# Allegro board KB_V16.brd
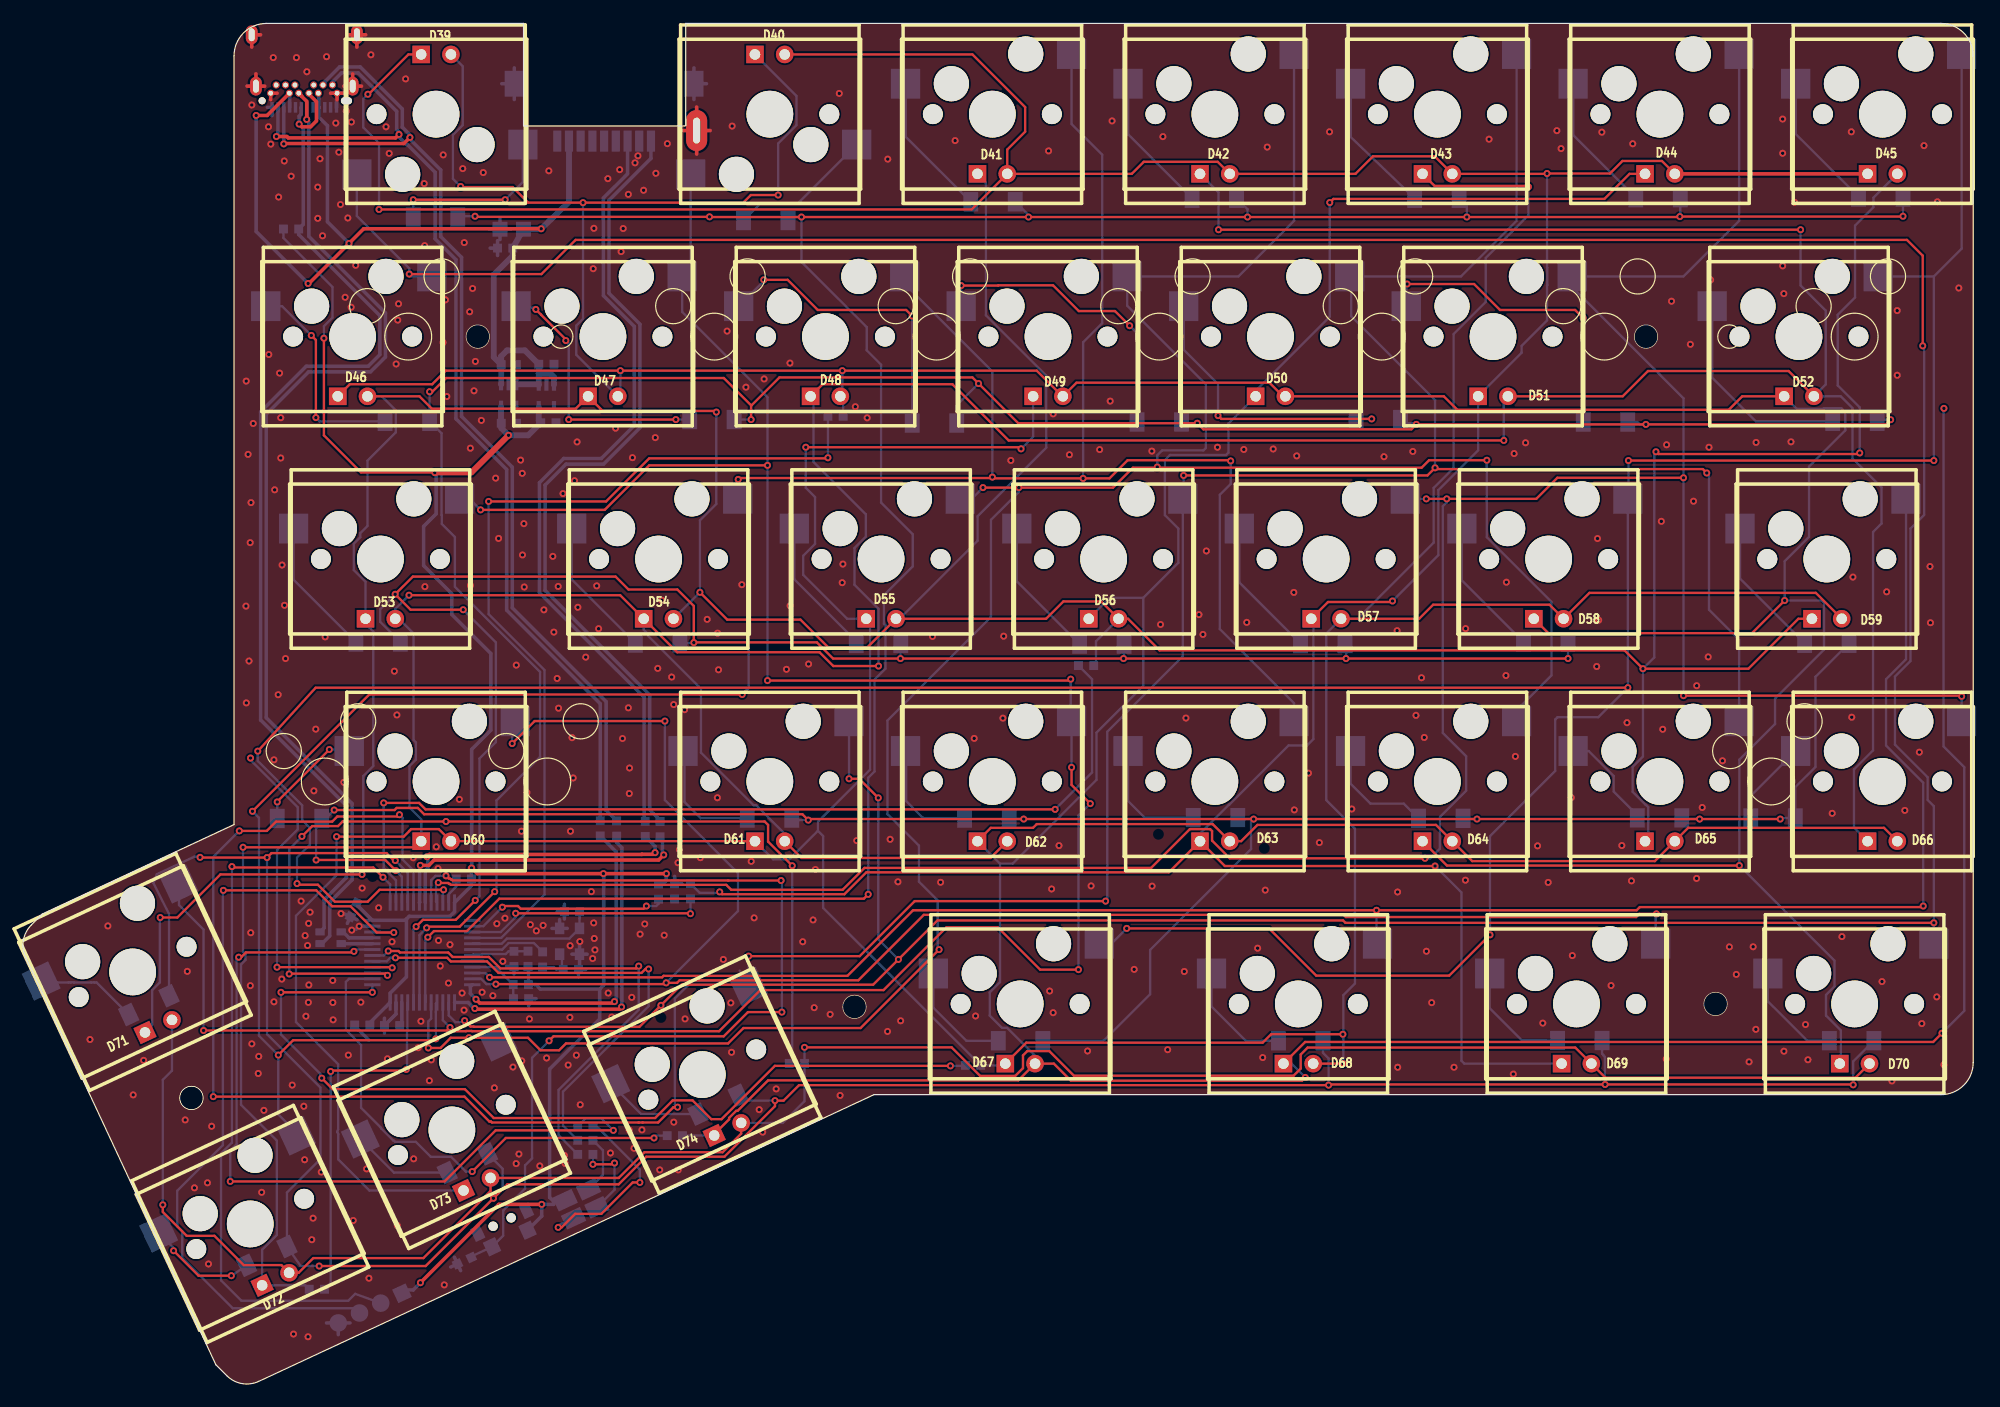
[diagram p0: board, top side]
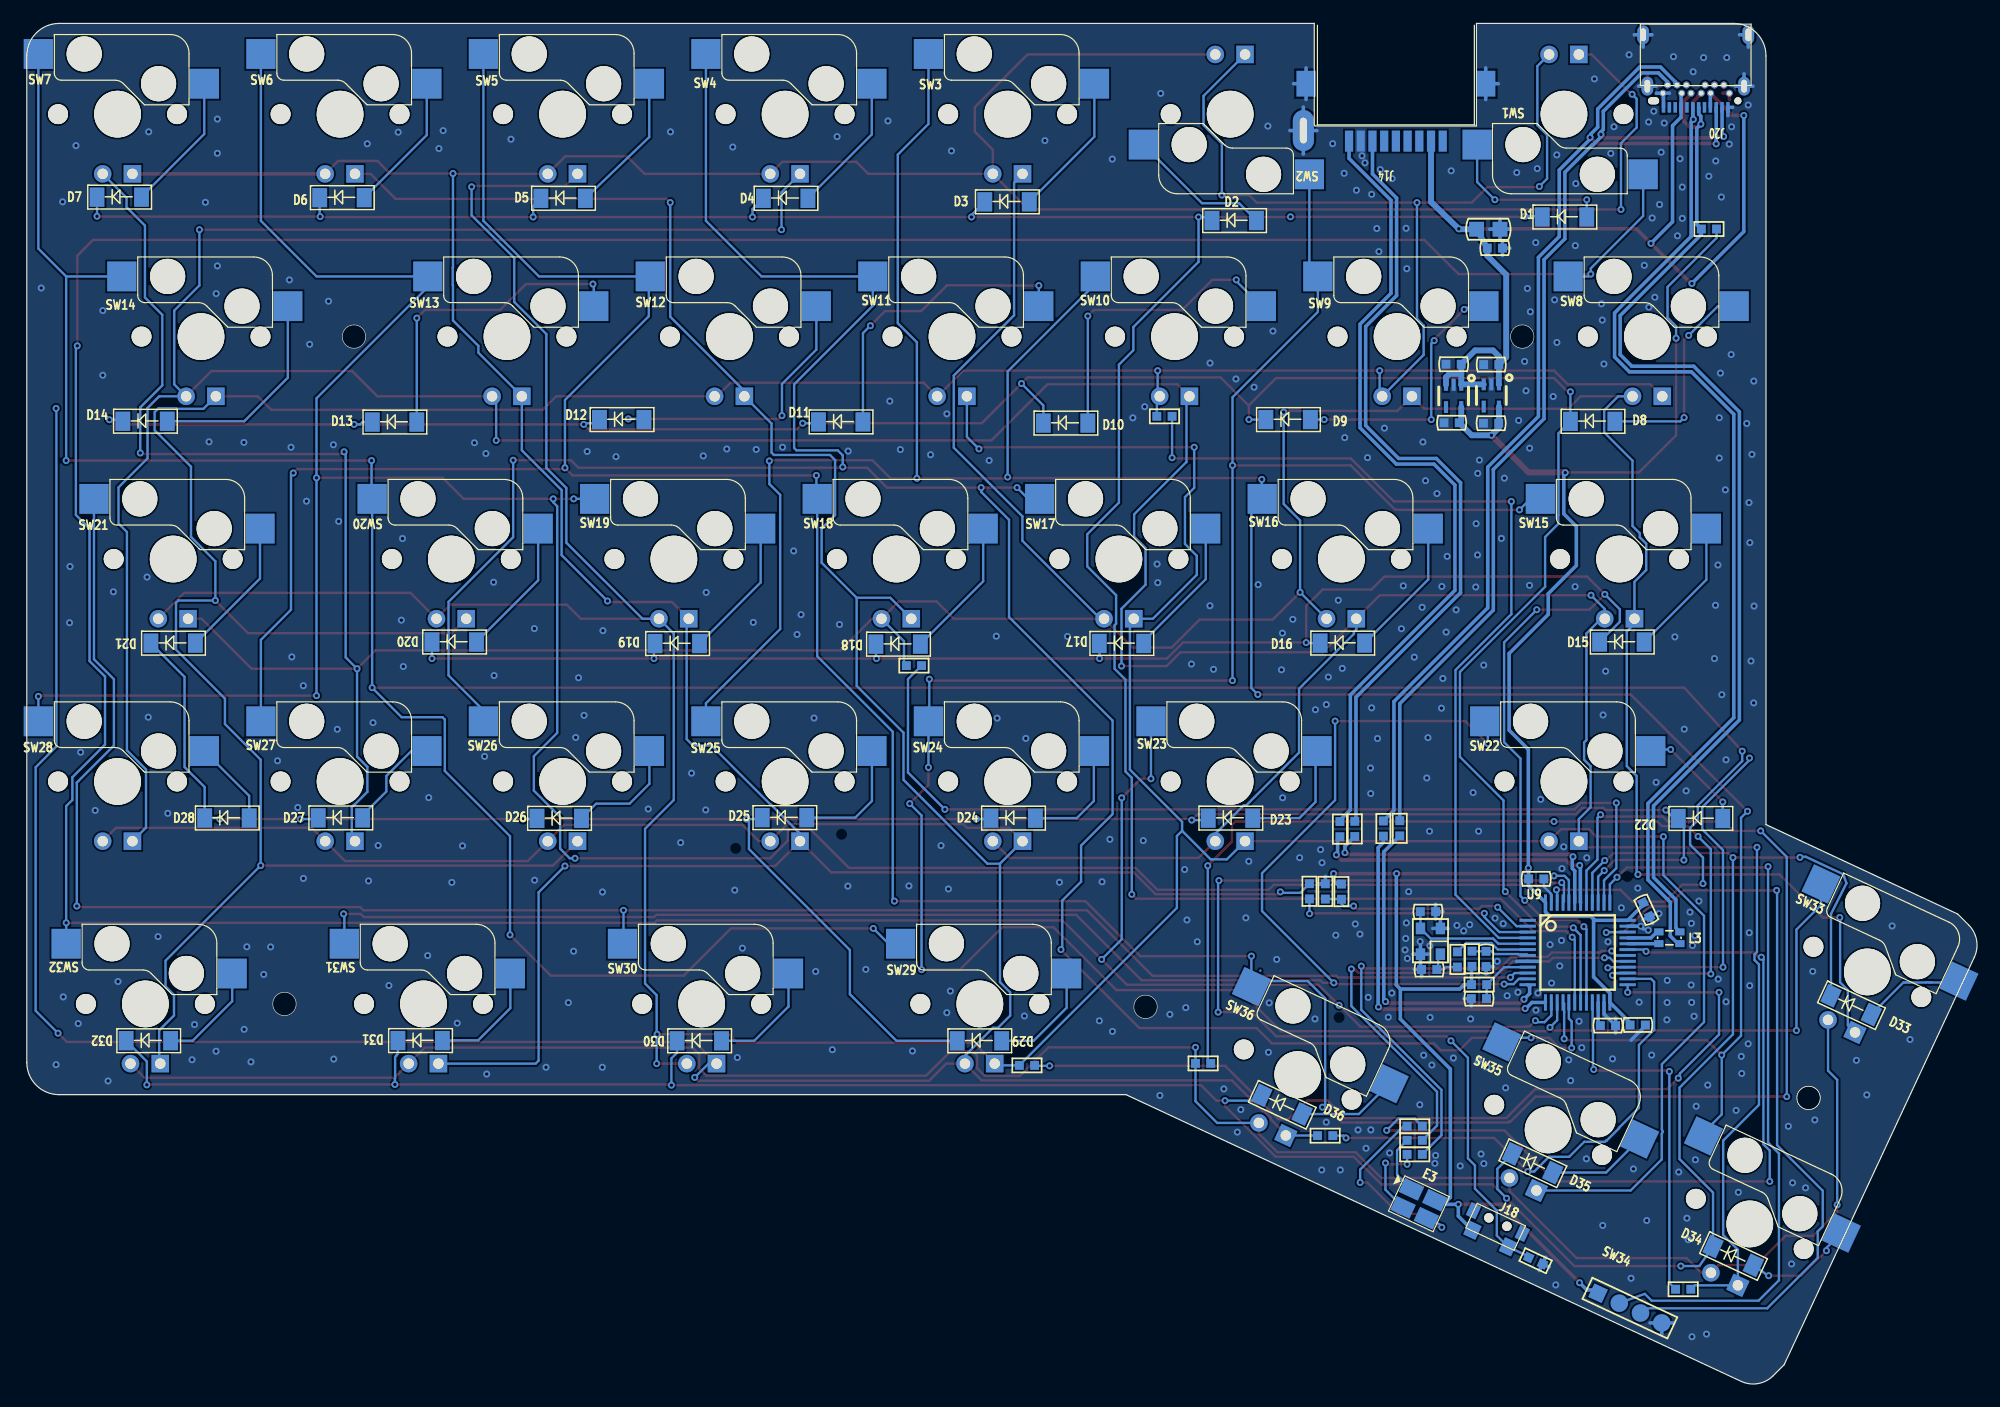
[diagram p1: board, bottom side, seen from below]

Outline 166.48 x 116.18 mm; copper layers: TOP, BOTTOM. Coordinates in mm from the lower left corner of the outline.
Outline path: circle c14.35,24.4 r1 ; circle c14.35,24.4 r1 ; circle c38.79,89.43 r1 ; circle c70.96,32.18 r1 ; circle c138.54,89.43 r1 ; circle c144.48,32.43 r1 ; 0.19,36.42 arc(0,37.87) 0.68,39.17 1.61,40.11 17.98,47.75 17.98,113.41 arc(18.79,115.37) 20.75,116.18 42.7,116.18 42.7,107.45 42.73,107.42 56.48,107.42 56.55,107.49 56.55,116.18 163.71,116.18 arc(165.67,115.37) 166.48,113.41 166.48,27.43 arc(165.68,25.48) 163.73,24.68 72.62,24.68 20.09,0.19 arc(18.66,0) 17.37,0.67 16.43,1.61 0.19,36.42

## Design rules (mm)
nets with their own width: min track width 0.3; nets GND

## Placement (name value [footprint] x y rotation side)
C1  0.1uF/16V  [C0603]  41.88 36.92 270 bottom
C2  10uF/6.3V  [C0603]  29.58 30.63 180 bottom
C4  0.1uF/16V  [C0603]  28.47 41.06 245 bottom
C5  0.1uF/16V  [C0603]  38.25 43.11 180 bottom
C6  0.1uF/16V  [C0603]  41.84 32.88 0 bottom
C7  22pF/50V  [C0603]  46.19 40.31 0 bottom
C8  22pF/50V  [C0603]  47.39 35.37 180 bottom
C9  2.2uF/6.3V  [C0603]  32.12 30.58 180 bottom
C10  0.1uF/16V  [C0603]  41.78 96.99 180 bottom
C11  22uF/6.3V  [C0805]  42.69 98.6 180 bottom
C12  1uF/10V  [C0603]  40.79 87.04 0 bottom
C13  1uF/10V  [C0603]  40.8 82.03 0 bottom
C14  1uF/10V  [C0603]  44 87.07 0 bottom
C15  1uF/10V  [C0603]  44.17 82.07 0 bottom
D1  RB520S-30  [SOD123]  37.09 99.64 180 bottom
D2  RB520S-30  [SOD123]  65.29 99.34 180 bottom
D3  RB520S-30  [SOD123]  84.69 100.94 180 bottom
D4  RB520S-30  [SOD123]  103.59 101.24 180 bottom
D5  RB520S-30  [SOD123]  122.59 101.24 180 bottom
D6  RB520S-30  [SOD123]  141.47 101.3 180 bottom
D7  RB520S-30  [SOD123]  160.49 101.34 180 bottom
D8  RB520S-30  [SOD123]  34.68 82.19 180 bottom
D9  RB520S-30  [SOD123]  60.69 82.34 180 bottom
D10  RB520S-30  [SOD123]  79.69 82.04 180 bottom
D11  RB520S-30  [SOD123]  98.89 82.14 180 bottom
D12  RB520S-30  [SOD123]  117.59 82.34 180 bottom
D13  RB520S-30  [SOD123]  136.98 82.13 180 bottom
D14  RB520S-30  [SOD123]  158.28 82.2 180 bottom
D15  RB520S-30  [SOD123]  32.19 63.34 180 bottom
D16  RB520S-30  [SOD123]  56.05 63.25 180 bottom
D17  RB520S-30  [SOD123]  74.91 63.22 180 bottom
D18  RB520S-30  [SOD123]  93.98 63.16 180 bottom
D19  RB520S-30  [SOD123]  112.84 63.21 180 bottom
D20  RB520S-30  [SOD123]  131.89 63.34 180 bottom
D21  RB520S-30  [SOD123]  155.89 63.24 180 bottom
D22  RB520S-30  [SOD123]  25.47 48.27 180 bottom
D23  RB520S-30  [SOD123]  65.61 48.3 180 bottom
D24  RB520S-30  [SOD123]  84.16 48.3 180 bottom
D25  RB520S-30  [SOD123]  103.69 48.34 180 bottom
D26  RB520S-30  [SOD123]  122.92 48.28 180 bottom
D27  RB520S-30  [SOD123]  141.6 48.32 180 bottom
D28  RB520S-30  [SOD123]  151.29 48.31 180 bottom
D29  RB520S-30  [SOD123]  87.04 29.28 180 bottom
D30  RB520S-30  [SOD123]  110.96 29.28 180 bottom
D31  RB520S-30  [SOD123]  134.79 29.3 180 bottom
D32  RB520S-30  [SOD123]  158 29.29 180 bottom
D33  RB520S-30  [SOD123]  12.43 33.13 205 bottom
D34  RB520S-30  [SOD123]  22.5 11.71 205 bottom
D35  RB520S-30  [SOD123]  39.63 19.63 205 bottom
D36  RB520S-30  [SOD123]  61.03 24.63 205 bottom
D39  GREEN-LED  [DIP_LED]  35.23 113.53 0 top
D40  GREEN-LED  [DIP_LED]  63.73 113.53 0 top
D41  GREEN-LED  [DIP_LED]  82.73 103.33 0 top
D42  GREEN-LED  [DIP_LED]  101.73 103.33 0 top
D43  GREEN-LED  [DIP_LED]  120.73 103.33 0 top
D44  GREEN-LED  [DIP_LED]  139.73 103.33 0 top
D45  GREEN-LED  [DIP_LED]  158.73 103.33 0 top
D46  GREEN-LED  [DIP_LED]  28.11 84.33 0 top
D47  GREEN-LED  [DIP_LED]  49.48 84.33 0 top
D48  GREEN-LED  [DIP_LED]  68.48 84.33 0 top
D49  GREEN-LED  [DIP_LED]  87.48 84.33 0 top
D50  GREEN-LED  [DIP_LED]  106.48 84.33 0 top
D51  GREEN-LED  [DIP_LED]  125.48 84.33 0 top
D52  GREEN-LED  [DIP_LED]  151.61 84.33 0 top
D53  GREEN-LED  [DIP_LED]  30.48 65.33 0 top
D54  GREEN-LED  [DIP_LED]  54.23 65.33 0 top
D55  GREEN-LED  [DIP_LED]  73.23 65.33 0 top
D56  GREEN-LED  [DIP_LED]  92.23 65.33 0 top
D57  GREEN-LED  [DIP_LED]  111.23 65.33 0 top
D58  GREEN-LED  [DIP_LED]  130.23 65.33 0 top
D59  GREEN-LED  [DIP_LED]  153.98 65.33 0 top
D60  GREEN-LED  [DIP_LED]  35.23 46.33 0 top
D61  GREEN-LED  [DIP_LED]  63.73 46.33 0 top
D62  GREEN-LED  [DIP_LED]  82.73 46.33 0 top
D63  GREEN-LED  [DIP_LED]  101.73 46.33 0 top
D64  GREEN-LED  [DIP_LED]  120.73 46.33 0 top
D65  GREEN-LED  [DIP_LED]  139.73 46.33 0 top
D66  GREEN-LED  [DIP_LED]  158.73 46.33 0 top
D67  GREEN-LED  [DIP_LED]  85.11 27.33 0 top
D68  GREEN-LED  [DIP_LED]  108.86 27.33 0 top
D69  GREEN-LED  [DIP_LED]  132.61 27.33 0 top
D70  GREEN-LED  [DIP_LED]  156.36 27.33 0 top
D71  GREEN-LED  [DIP_LED]  11.53 30.53 25 top
D72  GREEN-LED  [DIP_LED]  21.53 8.93 25 top
D73  GREEN-LED  [DIP_LED]  38.73 17.03 25 top
D74  GREEN-LED  [DIP_LED]  60.13 21.73 25 top
E3  RGB-LED  [LED_3528_2]  47.59 15.4 205 bottom
J2  ARM_PROG  [SIP_4P_50_DL_ARM]  32.32 7.72 205 bottom
J14  CON12  [USBATYPE]  49.58 116.03 0 bottom
J18  CON6  [KEYRESET]  40.87 13.8 205 bottom
J20  CON30  [USBMINICTYPEDIP]  20.38 109.57 0 bottom
L1  300R/100MHz  [R0603]  43.12 34.08 180 bottom
L3  SDCW2012-2-900TF  [SDCW2012]  26.23 38.08 180 bottom
NOREF  -  []  20.09 0.19 90 top
NOREF#2  -  []  0.19 36.42 0 top
R2  10K/1%  [R0603]  43.08 35.64 90 bottom
R4  910R  [R0603]  44.33 35.58 90 bottom
R20  1K  [R0603]  48.62 20.78 180 bottom
R21  510R  [R0603]  48.62 19.58 180 bottom
R22  330R  [R0603]  48.62 21.98 180 bottom
R26  330R  [R0603]  37.06 10.22 25 bottom
R27  1.5K  [R0603]  23.5 98.62 180 bottom
R28  1K  [R0603]  55.6 42.69 270 bottom
R29  1K  [R0603]  54.23 41.37 90 bottom
R30  330R  [R0603]  54.36 48.01 270 bottom
R31  330R  [R0603]  53.09 48.03 270 bottom
R32  330R  [R0603]  49.25 48.08 270 bottom
R33  330R  [R0603]  50.65 48.06 270 bottom
R34  1K  [R0603]  56.96 42.7 270 bottom
R35  1K  [R0603]  69.99 82.62 180 bottom
R36  1K  [R0603]  91.38 61.33 180 bottom
R37  1K  [R0603]  24.4 8.06 0 bottom
R38  1K  [R0603]  81.73 27.18 180 bottom
R39  1K  [R0603]  56.27 21.18 180 bottom
R40  1K  [R0603]  66.69 27.35 180 bottom
SW1  2-WAY SWITCH  [KEY_SECONDLITE]  35.23 108.43 0 bottom
SW2  2-WAY SWITCH  [KEY_SECONDLITE1]  63.73 108.43 0 bottom
SW3  2-WAY SWITCH  [KEY_SECOND]  82.73 108.43 180 bottom
SW4  2-WAY SWITCH  [KEY_SECOND]  101.73 108.43 180 bottom
SW5  2-WAY SWITCH  [KEY_SECOND]  120.73 108.43 180 bottom
SW6  2-WAY SWITCH  [KEY_SECOND]  139.73 108.43 180 bottom
SW7  2-WAY SWITCH  [KEY_SECOND]  158.73 108.43 180 bottom
SW8  2-WAY SWITCH  [KEY_SECOND]  28.11 89.43 180 bottom
SW9  2-WAY SWITCH  [KEY_SECOND]  49.48 89.43 180 bottom
SW10  2-WAY SWITCH  [KEY_SECOND]  68.48 89.43 180 bottom
SW11  2-WAY SWITCH  [KEY_SECOND]  87.48 89.43 180 bottom
SW12  2-WAY SWITCH  [KEY_SECOND]  106.48 89.43 180 bottom
SW13  2-WAY SWITCH  [KEY_SECOND]  125.48 89.43 180 bottom
SW14  2-WAY SWITCH  [KEY_SECOND]  151.61 89.43 180 bottom
SW15  2-WAY SWITCH  [KEY_SECOND]  30.48 70.43 180 bottom
SW16  2-WAY SWITCH  [KEY_SECOND]  54.23 70.43 180 bottom
SW17  2-WAY SWITCH  [KEY_SECOND]  73.23 70.43 180 bottom
SW18  2-WAY SWITCH  [KEY_SECOND]  92.23 70.43 180 bottom
SW19  2-WAY SWITCH  [KEY_SECOND]  111.23 70.43 180 bottom
SW20  2-WAY SWITCH  [KEY_SECOND]  130.23 70.43 180 bottom
SW21  2-WAY SWITCH  [KEY_SECOND]  153.98 70.43 180 bottom
SW22  2-WAY SWITCH  [KEY_SECOND]  35.23 51.43 180 bottom
SW23  2-WAY SWITCH  [KEY_SECOND]  63.73 51.43 180 bottom
SW24  2-WAY SWITCH  [KEY_SECOND]  82.73 51.43 180 bottom
SW25  2-WAY SWITCH  [KEY_SECOND]  101.73 51.43 180 bottom
SW26  2-WAY SWITCH  [KEY_SECOND]  120.73 51.43 180 bottom
SW27  2-WAY SWITCH  [KEY_SECOND]  139.73 51.43 180 bottom
SW28  2-WAY SWITCH  [KEY_SECOND]  158.73 51.43 180 bottom
SW29  2-WAY SWITCH  [KEY_SECOND]  85.11 32.43 180 bottom
SW30  2-WAY SWITCH  [KEY_SECOND]  108.86 32.43 180 bottom
SW31  2-WAY SWITCH  [KEY_SECOND]  132.61 32.43 180 bottom
SW32  2-WAY SWITCH  [KEY_SECOND]  156.36 32.43 180 bottom
SW33  2-WAY SWITCH  [KEY_SECOND]  9.33 35.16 205 bottom
SW34  2-WAY SWITCH  [KEY_SECOND]  19.36 13.64 205 bottom
SW35  2-WAY SWITCH  [KEY_SECOND]  36.58 21.67 205 bottom
SW36  2-WAY SWITCH  [KEY_SECOND]  57.96 26.39 205 bottom
U3  SGM2019-3.3YC5G/TR  [SC70-5]  44.65 84.36 270 bottom
U4  SGM2019-3.3YC5G/TR  [SC70-5]  41.43 84.4 270 bottom
U9  STM32F103C6  [LQFP48_20_355]  34.06 36.82 180 bottom
Y1  12MHz/12pF/30ppm  [OSC3225]  46.63 37.78 0 bottom

## Library data of the parts
C1 C2 C4-C10 C12-C15 = CAP NP: User Part Number: *; Tolerance: *
C11 = CAP NP: Tolerance: *; User Part Number: *
D1-D36 = DIODE
D39-D74 = LED-0805
E3 = LED_3528_RGB
J2 = CON4
J14 = CON12
J18 = CON6
J20 = CON30
L1 = BEAD: User Part Number: *; Tolerance: *
L3 = CHOKE CM14
R2 R4 R20-R22 R26-R40 = R: User Part Number: *; Tolerance: *
SW1-SW36 = SW KEY-SPST
U3 U4 = PAM3101DBA330
U9 = STM32F103C6
Y1 = CRYSTAL-3225: User Part Number: pn; Tolerance: RichardLC

## Footprints (pads in the part's own frame, mm; a bottom-side part is the same pattern mirrored in y, then rotated)
C0603
  rect 0.76x0.76 smd: 1(0,0) 2(1.3,0)
C0805
  rect 1.27x1.27 smd: 1(0,0) 2(2,0)
DIP_LED
  rect 1.5x1.5 hole 0.9: 1(-1.27,0)
  round 1.5 hole 0.9: 2(1.27,0)
KEY_SECOND
  round 1.702 hole 1.702 unplated: (-5.08,0) (5.08,0)
  round 3 hole 3 unplated: (-2.85,5.14) (3.5,2.6)
  round 3.988 hole 3.988 unplated: (0,0)
  rect 2.5x2.55 smd: 1(-6.763,5.14) 2(7.412,2.6)
KEY_SECONDLITE
  round 1.702 hole 1.702 unplated: (-5.08,0)
  round 3 hole 3 unplated: (-2.85,5.14) (3.5,2.6)
  round 3.988 hole 3.988 unplated: (0,0)
  rect 2.5x2.55 smd: 1(-6.763,5.14) 2(7.412,2.6)
KEY_SECONDLITE1
  round 3 hole 3 unplated: (-2.85,5.14) (3.5,2.6)
  round 3.988 hole 3.988 unplated: (0,0)
  round 1.702 hole 1.702 unplated: (5.08,0)
  rect 2.5x2.55 smd: 1(-6.763,5.14) 2(7.412,2.6)
KEYRESET
  round 0.8 hole 0.8 unplated: (-0.85,0) (0.85,0)
  rect 0.9x1.2 smd: 1(-2.3,0) 2(2.3,0)
  rect 1.15x1.3 smd: 3(-1.675,-1.55) 4(1.675,-1.55)
LED_3528_2
  rect 1.8x1.3 smd: 1(-1.1,0.8) 2(-1.1,-0.9) 3(1.1,-0.9) 4(1.1,0.8)
LQFP48_20_355
  rect 1.397x0.254 smd: 1(-4.266,2.75) 2(-4.266,2.25) 3(-4.266,1.75) 4(-4.266,1.25) 5(-4.266,0.75) 6(-4.266,0.25) 7(-4.266,-0.25) 8(-4.266,-0.75) 9(-4.266,-1.25) 10(-4.266,-1.75) 11(-4.266,-2.25) 12(-4.266,-2.75) 25(4.266,-2.75) 26(4.266,-2.25) 27(4.266,-1.75) 28(4.266,-1.25) 29(4.266,-0.75) 30(4.266,-0.25) 31(4.266,0.25) 32(4.266,0.75) 33(4.266,1.25) 34(4.266,1.75) 35(4.266,2.25) 36(4.266,2.75)
  rect 0.254x1.397 smd: 13(-2.75,-4.266) 14(-2.25,-4.266) 15(-1.75,-4.266) 16(-1.25,-4.266) 17(-0.75,-4.266) 18(-0.25,-4.266) 19(0.25,-4.266) 20(0.75,-4.266) 21(1.25,-4.266) 22(1.75,-4.266) 23(2.25,-4.266) 24(2.75,-4.266) 37(2.75,4.266) 38(2.25,4.266) 39(1.75,4.266) 40(1.25,4.266) 41(0.75,4.266) 42(0.25,4.266) 43(-0.25,4.266) 44(-0.75,4.266) 45(-1.25,4.266) 46(-1.75,4.266) 47(-2.25,4.266) 48(-2.75,4.266)
OSC3225
  rect 0.8x1 smd: 1(-0.85,1.1) 2(-0.85,-1.1) 3(0.85,-1.1) 4(0.85,1.1)
R0603
  rect 0.76x0.76 smd: 1(0,0) 2(1.3,0)
SC70-5
  rect 1.016x0.356 smd: 1(-0.95,0.65) 2(-0.95,0) 3(-0.95,-0.65) 4(0.95,-0.65) 5(0.95,0.65)
SDCW2012
  rect 0.8x0.6 smd: 1(-0.9,0.5) 2(0.9,0.5) 3(0.9,-0.5) 4(-0.9,-0.5)
SIP_4P_50_DL_ARM
  rect 1.27x1.27 smd: 1(0,0)
  round 1.5 smd: 2(2,0) 3(4,0) 4(6,0)
SOD123
  rect 1.27x1.651 smd: 1(3.8,0) 2(0,0)
USBATYPE
  rect 0.7x1.8 smd: 1(-3,9.9) 2(-1,9.9) 3(1,9.9) 4(3,9.9) 5(4,9.9) 6(2,9.9) 7(0,9.9) 8(-2,9.9) 9(-4,9.9)
  rect 1.64x2.2 smd: 10(-7.67,5) 11(7.67,5)
  oval 1.8x3.5 hole 0.6x2.2: 12(7.9,9)
USBMINICTYPEDIP
  oval 0.95x0.6 hole 0.95x0.6 unplated: (7.2,0)
  rect 0.3x0.9 smd: 1(0.85,0.56) 2(1.35,0.56) 3(1.85,0.56) 4(2.35,0.56) 5(2.85,0.56) 6(3.35,0.56) 7(3.85,0.56) 8(4.35,0.56) 9(4.85,0.56) 10(5.35,0.56) 11(5.85,0.56) 12(6.35,0.56)
  round 0.6 hole 0.4: 13(6.4,-0.65) 14(6,-1.35) 15(5.2,-1.35) 16(4.8,-0.65) 17(4.4,-1.35) 18(4,-0.65) 19(3.13,-0.65) 20(2.8,-1.35) 21(2.33,-0.65) 22(2,-1.35) 23(1.2,-1.35) 24(0.73,-0.65)
  round 0.6 hole 0.65: 25(0,0)
  oval 1x1.6 hole 0.5x1.1: 27(-0.53,-1.25) 28(7.73,-1.25) 29(-0.89,-5.64) 30(8.09,-5.64)

## Nets
GND: C1.2 C2.2 C4.2 C5.2 C6.2 C7.1 C8.1 C9.2 C10.2 C11.2 C12.2 C13.2 C14.2 C15.2 J2.4 J14.4 J14.10 J14.11 J14.12 J20.1 J20.12 J20.13 J20.24 J20.27 J20.28 J20.29 J20.30 R26.1 R28.1 U3.2(GND) U4.2(GND) U9.8(VSSA/VREF-) U9.23(VSS1) U9.35(VSS2) U9.47(VSS3) Y1.2(GND#2) Y1.4(GND#4)
VBUS_R: C10.1 C11.1 C12.1 C14.1 J14.1 J20.4 J20.9 J20.16 J20.21 U3.1(VIN) U3.3(EN) U4.1(VIN) U4.3(EN)
VCC_3V3_R: C2.1 C4.1 C5.1 C13.1 C15.1 E3.4(COM) J2.1 J18.3 L1.1 R2.1 R27.2 R29.2 U3.5(VOUT) U4.5(VOUT) U9.24(VDD1) U9.36(VDD2) U9.48(VDD3)
ARM_SWCLK_R: J2.2 U9.37(PA14/JTCK_SWCK)
ARM_SWDIO_R: J2.3 U9.34(PA13/JTMS_SWDIO)
CA1: R34.2 U9.3(PC14/OSC32_IN)
CA2: R35.2 U9.4(PC15/OSC32_OUT)
CA3: R36.2 U9.38(PA15/JTDI/SPI1_NSS/SPI3_NSS/I2S)
CA4: R37.2 U9.21(PB10/SPI2_SCK/I2S2_CK/I2C2_SCL/)
CA5: R38.2 U9.25(PB12/SPI2_NSS/I2S2_WS/I2C2_SMBA)
CA6: R39.2 U9.26(PB13/SPI2_SCK/I2S2_CK/TIM1_CH1N)
CA7: R40.2 U9.27(PB14/SPI2_MISO/I2S2EXT_SD/TIM1_)
COL1: SW21.1 SW30.1 U9.10(PA0/USART2_CTS/TIM2_CH1/TIM2_ET)
COL2: SW22.1 SW31.1 U9.11(PA1/USART2_RTS/TIM2_CH2/TIM5_CH)
COL3: SW1.1 SW8.1 SW23.1 SW32.1 U9.14(PA4/SPI1_NSS/SPI3_NSS/I2S3_WS/U)
COL4: SW2.1 SW9.1 SW15.1 SW24.1 SW33.1 U9.15(PA5/SPI1_SCK/TIM2_CH1/TIM2_ETR/)
COL5: SW3.1 SW10.1 SW16.1 SW25.1 SW34.1 U9.16(PA6/SPI1_MISO/TIM1_BKIN/TIM3_CH)
COL6: SW4.1 SW11.1 SW17.1 SW26.1 SW35.1 U9.17(PA7/SPI1_MOSI/TIM1_CH1N,TIM3_CH)
COL7: SW5.1 SW12.1 SW18.1 SW27.1 SW36.1 U9.41(PB5/SPI1_MOSI/SPI3_MOSI/I2S3_SD)
COL8: SW6.1 SW13.1 SW19.1 SW28.1 U9.45(PB8/I2C1_SCL/TIM4J_CH3/TIM10_CH)
COL9: SW7.1 SW14.1 SW20.1 SW29.1 U9.46(PB9/SPI2_NSS/I2S2_WS/I2C1_SDA/T)
PA15_R_B: R22.2 U9.31(PA10/USART1_RX/TIM1_CH3/OTG_FS_)
PC14_R_R: R20.2 U9.29(PA8/I2C3_SCL/USART1_CK/TIM1_CH1)
PC15_R_G: R21.2 U9.30(PA9/I2C3_SMBA/USART1_TX/TIM1_CH)
PCBVER: R28.2 R29.1 U9.2(PC13/RTC_TAMP1/RTC_OUT/RTC_TS)
ROW1: D1.2(K) D2.2(K) D3.2(K) D4.2(K) D5.2(K) D6.2(K) D7.2(K) U9.18(PB0/TIM1_CH2N/TIM3_CH3/ADC1_IN8)
ROW2: D8.2(K) D9.2(K) D10.2(K) D11.2(K) D12.2(K) D13.2(K) D14.2(K) U9.19(PB1/TIM1_CH3N/TIM3_CH4/ADC1_IN9)
ROW3: D15.2(K) D16.2(K) D17.2(K) D18.2(K) D19.2(K) D20.2(K) U9.20(PB2/BOOT1)
ROW4: D21.2(K) D22.2(K) D23.2(K) D24.2(K) D25.2(K) D26.2(K) D27.2(K) D28.2(K) D29.2(K) U9.39(PB3/JTDO_SWO/SPI1_SCK/SPI3_SCK/)
ROW5: D30.2(K) D31.2(K) D32.2(K) D33.2(K) D34.2(K) D35.2(K) D36.2(K) U9.40(PB4/NJTRST/SPI1_MISO/SPI3_MISO_)
UART1_RX: J14.6 R31.1
UART1_RX_R: R31.2 U9.43(PB7/I2C1_SDA/USART1_RX/TIM4_CH2)
UART1_TX: J14.5 R30.1
UART1_TX_R: R30.2 U9.42(PB6/I2C1_SCL/USART1_TX/TIM4_CH1)
UART2_RX: J20.3 J20.15 R33.1
UART2_RX_R: R33.2 U9.13(PA3/USART2_RX/TIM2_CH4/TIM5_CH4)
UART2_TX: J20.2 J20.14 R32.1
UART2_TX_R: R32.2 U9.12(PA2/USART2_TX/TIM2_CH3/TIM5_CH3)
USB_DM_R: J20.7 J20.19 L3.3
USB_DP_R: J20.6 J20.18 L3.2 R27.1
N16743024: J18.4 R26.2 U9.44(BOOT0)
N16743076: C6.1 L1.2 U9.9(VDDA/VREF+)
N16743758: C1.1 R2.2 U9.7(NRST)
N16743834: C8.2 R4.1 Y1.1(XIN)
N16743838: C7.2 U9.5(PH0/OSC_IN) Y1.3(XOUT)
N16743898: R4.2 U9.6(PH1/OSC_OUT)
N16744056: C9.1 U9.22(VCAP1)
N16744084: L3.1 U9.33(PA12/USART1_RTS/USART6_RX/TIM1_)
N16744088: L3.4 U9.32(PA11/USART1_CTS/USART6_TX/TIM1_)
N16823930: E3.1(R) R20.1
N16823933: E3.2(G) R21.1
N16823936: E3.3(B) R22.1
N16868125: D1.1(A) SW1.2
N16868343: D2.1(A) SW2.2
N16868345: D3.1(A) SW3.2
N16868355: D4.1(A) SW4.2
N16868357: D5.1(A) SW5.2
N16868359: D6.1(A) SW6.2
N16868361: D7.1(A) SW7.2
N16868363: D8.1(A) SW8.2
N16868373: D9.1(A) SW9.2
N16868375: D10.1(A) SW10.2
N16868377: D11.1(A) SW11.2
N16868379: D12.1(A) SW12.2
N16868381: D13.1(A) SW13.2
N16868383: D14.1(A) SW14.2
N16868385: D15.1(A) SW15.2
N16868387: D16.1(A) SW16.2
N16868389: D17.1(A) SW17.2
N16868391: D18.1(A) SW18.2
N16868393: D19.1(A) SW19.2
N16868395: D20.1(A) SW20.2
N16868397: D21.1(A) SW21.2
N16868399: D22.1(A) SW22.2
N16868401: D23.1(A) SW23.2
N16868403: D24.1(A) SW24.2
N16868405: D25.1(A) SW25.2
N16868407: D26.1(A) SW26.2
N16868409: D27.1(A) SW27.2
N16868416: D28.1(A) SW28.2
N16868418: D29.1(A) SW29.2
N16868420: D30.1(A) SW30.2
N16868422: D31.1(A) SW31.2
N16868424: D32.1(A) SW32.2
N16868428: D33.1(A) SW33.2
N16868430: D34.1(A) SW34.2
N16868645: D35.1(A) SW35.2
N16868659: D36.1(A) SW36.2
N16872373: D39.1(ANODE) D40.2(CATHODE) D41.2(CATHODE) D42.2(CATHODE) D43.2(CATHODE) D44.2(CATHODE) D45.1(ANODE) D51.1(ANODE) D57.1(ANODE) D63.1(ANODE) D69.1(ANODE) R34.1
N16872399: D39.2(CATHODE) D40.1(ANODE) D46.1(ANODE) D47.2(CATHODE) D48.2(CATHODE) D49.2(CATHODE) D50.2(CATHODE) D52.1(ANODE) D58.1(ANODE) D64.1(ANODE) D70.1(ANODE) R35.1
N16872431: D41.1(ANODE) D45.2(CATHODE) D46.2(CATHODE) D47.1(ANODE) D53.1(ANODE) D54.2(CATHODE) D55.2(CATHODE) D56.2(CATHODE) D59.1(ANODE) D65.1(ANODE) D71.1(ANODE) R36.1
N16872455: D42.1(ANODE) D48.1(ANODE) D51.2(CATHODE) D52.2(CATHODE) D53.2(CATHODE) D54.1(ANODE) D60.1(ANODE) D61.2(CATHODE) D62.2(CATHODE) D66.1(ANODE) D72.1(ANODE) R37.1
N16872486: D43.1(ANODE) D49.1(ANODE) D55.1(ANODE) D57.2(CATHODE) D58.2(CATHODE) D59.2(CATHODE) D60.2(CATHODE) D61.1(ANODE) D67.1(ANODE) D68.2(CATHODE) D73.1(ANODE) R38.1
N16872510: D44.1(ANODE) D50.1(ANODE) D56.1(ANODE) D62.1(ANODE) D63.2(CATHODE) D64.2(CATHODE) D65.2(CATHODE) D66.2(CATHODE) D67.2(CATHODE) D68.1(ANODE) D74.1(ANODE) R39.1
N16873233: D69.2(CATHODE) D70.2(CATHODE) D71.2(CATHODE) D72.2(CATHODE) D73.2(CATHODE) D74.2(CATHODE) R40.1

Pads without a net: J14 2 3 7 8 9; J18 1 2; J20 5 8 10 11 17 20 22 23 25; U3 4; U4 4; U9 1 28

## Via types
v1: diameter 0.6, hole 0.3, TOP to BOTTOM, 642 vias

## Routing (per net, layer and track width the routed paths; a pad name or vN(x,y) marks a point on that pad's centre or on a via; arc(x,y) is an arc through that point)
GND: length 80.4
  TOP w0.3: 21.11,109.67 J20.24 21.66,110.22 ; 19.1,110.82 J20.27 ; J20.27 19.85,111.87 ; J20.27 20.6,110.82 ; 56.33,107.03 J14.12 ; J14.12 57.48,109.03 ; J14.12 57.48,105.03 ; J14.12 58.63,107.03 ; J20.28 28.11,111.87 ; J20.28 28.86,110.82 ; J20.28 27.36,110.82 ; 19.49,114.16 J20.29 20.24,115.21 ; J20.13 27.33,110.22 ; J20.13 26.23,110.22 ; J20.13 26.78,109.67 ; 28.47,114.16 J20.30 ; J20.30 29.22,115.21 ; J20.30 27.72,115.21
  BOTTOM w0.2: U9.47 36.31,41.79 36.4,41.89 36.4,41.9 36.95,42.45 C5.2 ; 28.42,38.82 28.21,38.82 28.12,38.73 v1(28.04,38.73)
  BOTTOM w0.3: J14.11 57.25,112.38 ; J14.11 57.25,109.68 ; J14.11 58.32,111.03 ; J2.4 27.88,5.18 ; J2.4 25.88,5.18 ; J2.4 26.88,4.18 ; 27.72,115.21 J20.30 ; J20.30 28.47,114.16 ; J20.30 29.22,115.21 ; 43.77,32.88 C6.2 43.14,32.25 ; C2.2 28.28,30.55 29.5,29.33 ; 55.6,43.32 R28.1 56.23,42.69 ; Y1.4 47.48,37.43 ; Y1.4 48.13,36.68 ; Y1.4 47.48,35.46 C8.1 ; Y1.4 46.83,36.68 ; C11.2 41.58,98.6 ; C11.2 40.69,99.48 ; C11.2 40.69,97.71 ; C11.2 39.81,98.6 ; 41.25,35.62 C1.2 41.88,34.99 ; C9.2 30.82,31.21 ; C9.2 31.81,31.57 U9.23 ; C9.2 30.82,29.95 ; J14.12 57.48,109.03 ; J14.12 56.33,107.03 ; J14.12 57.48,105.03 ; J14.12 58.63,107.03 ; 45.56,40.31 C7.1 ; C7.1 46.19,40.94 ; C7.1 46.19,39.68 ; J14.10 41.91,112.38 ; J14.10 40.84,111.03 ; J14.10 41.91,109.68 ; U9.35 28.67,39.07 v1(28.67,39.07) 28.42,38.82 ; 27.35,40.15 C4.2 ; C4.2 28.49,39.61 ; C4.2 27.66,39.31 ; J20.12 26.73,110.17 J20.13 ; J20.27 20.6,110.82 ; J20.27 19.1,110.82 ; J20.27 19.85,111.87 ; 20.24,115.21 J20.29 19.49,114.16 ; 28.86,110.82 J20.28 27.36,110.82 ; 45.13,38.88 Y1.2 ; Y1.2 45.78,39.63 ; Y1.2 46.43,38.88 ; 36.8,10.8 R26.1 ; R26.1 37.33,9.65 ; R26.1 36.49,9.96 ; 37.38,36.07 U9.8 39.28,36.07 ; 47.39,34.74 C8.1 ; C8.1 48.02,35.37 ; C10.2 40.48,97.62 ; C10.2 39.85,96.99 ; C10.2 40.48,96.36 ; J20.13 27.33,110.22 ; J20.13 26.23,110.22 ; 21.23,108.31 J20.1 20.83,109.01
  vias: v1(5.68,29.39) v1(7.21,39.09) v1(9.37,24.66) v1(10.26,27.61) v1(13.81,22.52) v1(13.99,35.21) v1(14.6,16.72) v1(15.71,17.15) v1(15.8,10.22) v1(16.07,21.98) v1(19.02,85.63) v1(19,66.41) v1(19.03,58.14) v1(19.18,79.37) v1(19.26,61.72) v1(19.36,71.83) v1(19.37,33.99) v1(19.43,75.25) v1(19.41,38.51) v1(19.5,109.21) v1(19.5,29.02) v1(19.62,82.01) v1(20.05,26.49) v1(20.09,27.95) v1(20.34,16.34) v1(20.53,23.34) v1(20.92,107.35) v1(20.95,87.9) v1(21.12,105.87) v1(21.33,113.26) v1(21.45,76.34) v1(21.39,53.28) v1(21.39,32.61) v1(21.75,58.84) v1(21.79,101.35) v1(21.87,86.31) v1(21.97,82.5) v1(21.97,79.06) v1(22.06,34.55) v1(22.08,69.92) v1(22.27,104.43) v1(22.29,66.48) v1(22.38,61.93) v1(22.86,103.13) v1(22.95,25.5) v1(23.06,4.23) v1(23.31,113.26) v1(23.71,41.21) v1(23.94,23.69) v1(24.05,38.27) v1(24.01,19.12) v1(24.12,31.38) v1(24.2,112.05) v1(24.26,37.42) v1(24.35,39.31) v1(24.37,34.05) v1(24.33,32.56) v1(24.3,4) v1(24.47,40.27) v1(24.62,12.29) v1(24.73,14.13) v1(24.8,50.63) v1(24.96,55.9) v1(25.13,102.2) v1(25.13,99.53) v1(25.32,104.62) v1(25.43,18.07) v1(25.54,98.04) v1(25.76,63.78) v1(25.88,113.34) v1(26.41,34.44) v1(26.42,32.55) v1(26.44,31.07) v1(26.67,107.67) v1(26.93,105.18) v1(27.07,100.71) v1(27.12,40.14) v1(27.36,51.36) v1(27.47,92.79) v1(27.56,108.68) v1(27.7,99.56) v1(27.74,28.06) v1(27.98,91.94) v1(28,107.76) v1(28.16,13.93) v1(28.37,95.52) v1(28.81,32.58) v1(28.92,42.32) v1(29.3,18.34) v1(29.5,9) v1(29.67,113.5) v1(30.33,40.64) v1(30.96,107.35) v1(31.08,27.74) v1(31.23,105.08) v1(31.47,37.74) v1(31.67,60.85) v1(31.82,87.09) v1(31.96,90.84) v1(31.89,57.11) v1(31.92,13.51) v1(32.03,92.23) v1(32.63,111.44) v1(33.28,44.91) v1(33.32,19.2) v1(33.71,28.69) v1(33.94,30.95) v1(34.22,102.5) v1(34.26,97.2) v1(34.28,68.07) v1(34.66,25.88) v1(34.82,27.65) v1(35.25,45.85) v1(35.4,43.99) v1(35.44,37.85) v1(35.59,35.67) v1(35.84,104.95) v1(35.83,88.93) v1(35.93,8.43) v1(36.03,92.57) v1(36.15,84.31) v1(36.29,34.21) v1(36.42,37.49) v1(37.22,49.9) v1(37.45,33.36) v1(37.51,103.78) v1(37.64,97.46) v1(37.62,31.9) v1(38.1,91.55) v1(38.16,79.9) v1(38.17,68.18) v1(38.35,93.54) v1(38.47,84.8) v1(38.59,87.31) v1(39.1,82.27) v1(39.16,33.43) v1(39.26,103.44) v1(40.08,33.13) v1(40.21,25.26) v1(40.32,77.34) v1(40.42,39.28) v1(40.57,72.19) v1(40.93,36.07) v1(41.12,39.75) v1(41.8,27.04) v1(42.07,18.79) v1(42.08,61.37) v1(42.31,19.61) v1(42.45,78.88) v1(42.52,47.18) v1(42.55,27.56) v1(42.59,77.75) v1(42.61,70.78) v1(42.73,73.45) v1(42.76,68.04) v1(42.99,50.48) v1(43.28,39.2) v1(43.2,31.15) v1(43.79,38.67) v1(44.09,18.59) v1(44.37,39.14) v1(44.44,66.09) v1(44.67,27.81) v1(44.86,103.59) v1(45.2,70.66) v1(45.29,64.19) v1(45.57,60.23) v1(45.66,68.09) v1(45.69,57.69) v1(46.07,76.02) v1(46.19,19.49) v1(46.25,18.81) v1(46.51,27.21) v1(46.68,37.4) v1(46.66,31.28) v1(46.71,47.18) v1(46.84,55.17) v1(46.94,51.73) v1(47.05,77.12) v1(47.27,80.43) v1(47.21,28.05) v1(47.34,66.31) v1(47.51,37.76) v1(47.54,23.82) v1(48.01,62.05) v1(48.49,42.02) v1(48.65,95.23) v1(48.6,36.31) v1(48.71,98.68) v1(48.69,39.35) v1(48.74,38.02) v1(48.8,37.04) v1(48.95,68.14) v1(49.11,64.48) v1(49.9,102.92) v1(49.93,33.36) v1(50.12,19.7) v1(50.23,31.3) v1(50.56,81.61) v1(50.91,103.69) v1(51.03,96.69) v1(51.15,55.1) v1(51.21,98.66) v1(51.65,101.58) v1(51.65,57.72) v1(51.75,52.58) v1(51.73,50.4) v1(51.72,21.67) v1(51.94,32.99) v1(52,79.09) v1(52.13,20.1) v1(52.22,104.27) v1(52.47,104.87) v1(52.65,38.39) v1(52.81,21.67) v1(52.95,101.93) v1(53.05,39.26) v1(53.95,80.8) v1(54,103.38) v1(54.16,61.09) v1(54.33,18.25) v1(54.5,66.91) v1(54.71,38.3) v1(54.98,105.91) v1(55.35,60.35) v1(55.52,58) v1(55.53,22.33) v1(55.89,44.49) v1(55.91,18.25) v1(56.01,45.61) v1(56.45,57.56) v1(56.49,31.15) v1(57.8,44.92) v1(58.38,65.28) v1(59.27,64.1) v1(59.25,50.04) v1(59.35,60.97) v1(59.76,36.23) v1(60.08,89.9) v1(60.4,32.52) v1(60.46,28.3) v1(60.51,107.41) v1(61.34,68.24) v1(61.69,85.11) v1(62.14,44.61) v1(62.39,39.78) v1(62.82,23.4) v1(63.12,21.48) v1(63.24,85.81) v1(64.27,25.17) v1(65.15,61.01) v1(65.45,87.17) v1(65.46,66.44) v1(66.54,37.74) v1(67.04,61.46) v1(67.42,39.6) v1(67.52,32.11) v1(67.62,43.91) v1(68.88,31.54) v1(69.66,110.2) v1(69.73,24.61) v1(69.97,70) v1(69.91,68.41) v1(71.03,83.44) v1(71.15,46.38) v1(72.04,82.49) v1(73.78,30.08) v1(73.8,104.59) v1(74,46.49) v1(74.67,42.86) v1(74.9,30.99) v1(77.62,63.82) v1(78.31,42.82) v1(79.55,106.17) v1(81.18,55.11) v1(81.3,31.4) v1(83.63,56.84) v1(83.7,63.84) v1(84.31,78.85) v1(87.53,105.29) v1(87.62,33.53) v1(87.79,42.25) v1(87.92,82.83) v1(87.92,31.68) v1(88.42,45.95) v1(89.31,79.34) v1(90.86,28.41) v1(91.16,42.51) v1(91.89,79.78) v1(92.79,83.92) v1(92.95,107.85) v1(94.84,35.38) v1(96.35,79.65) v1(96.37,42.49) v1(97.09,64.84) v1(97.29,106.51) v1(97.7,28.52) v1(99.12,35.2) v1(99.26,56.85) v1(100.37,65.68) v1(100.71,63.99) v1(101,71.12) v1(101.95,79.98) v1(104.2,79.79) v1(104.45,65.02) v1(105.38,37.19) v1(105.81,27.85) v1(106.03,42.15) v1(106.2,105.62) v1(106.71,79.83) v1(108.47,67.58) v1(108.51,49) v1(108.72,79.24) v1(109.72,52.14) v1(110.65,46.21) v1(111.52,106.92) v1(113.42,49.08) v1(116.17,79.17) v1(117.29,64.31) v1(117.33,41.99) v1(117.34,27.02) v1(118.63,79.62) v1(118.9,57.08) v1(119.37,60.29) v1(119.61,55.19) v1(119.79,36.93) v1(120.24,32.54) v1(122.15,27.02) v1(123.14,64.49) v1(123.12,43) v1(125.14,106.29) v1(126.62,68.45) v1(126.58,60.48) v1(127.28,79.44) v1(127.21,26.44) v1(127.39,53.57) v1(128.26,80.36) v1(129.28,45.93) v1(129.73,30.79) v1(130.19,42.81) v1(130.93,107.02) v1(131.29,105.49) v1(132.16,50.05) v1(132.25,36.56) v1(134.33,61.25) v1(134.4,72.18) v1(134.5,65.21) v1(134.77,106.89) v1(135.56,34) v1(136.48,45.96) v1(136.92,56.45) v1(137.3,42.94) v1(137.41,105.9) v1(139.85,73.65) v1(139.97,55.89) v1(140.27,27.72) v1(140.3,80.19) v1(140.72,92.45) v1(142.33,88.77) v1(142.6,75.37) v1(142.87,59.61) v1(142.86,43.15) v1(143.34,49.21) v1(143.85,62.07) v1(143.92,79.98) v1(144.06,94.27) v1(145.07,53.2) v1(145.66,37.3) v1(146.25,34.95) v1(147.34,27.48) v1(147.69,37.31) v1(147.94,80.39) v1(147.92,30.26) v1(150.21,108.01) v1(150.21,105.09) v1(150.21,95.47) v1(150.31,93.1) v1(150.32,28.39) v1(150.92,80.44) v1(151.23,100.9) v1(152.16,30.67) v1(152.37,27.66) v1(154.44,48.71) v1(155.27,38.18) v1(156.07,106.92) v1(156.11,56.92) v1(156.21,68.89) v1(158.69,34.34) v1(159.09,67.63) v1(159.54,25.85) v1(159.99,91.65) v1(159.99,86.13) v1(160.64,48.96) v1(161.88,53.93) v1(162.09,30.75) v1(162.28,105.74) v1(162.79,69.79) v1(162.83,64.99) v1(163.37,33.03) v1(163.42,100.94) v1(163.98,27.24) v1(165.25,93.58)
VBUS_R: length 91.6
  TOP w0.3: J20.21 20.81,108.32 v1(19.87,108.32) ; v1(44.21,98.64) 29.05,98.64 v1(27.8,97.39) 24.38,93.97 v1(24.31,93.97)
  BOTTOM w0.3: J20.16 25.23,110.17 J20.9 25.23,108.17 25.96,107.44 25.96,99.23 v1(27.8,97.39) ; v1(24.31,93.97) 19.87,98.4 v1(19.87,108.32) ; J20.21 22.73,110.2 J20.4
  BOTTOM w0.5: U4.1 40.79,85.36 C12.1 ; 44,86.25 C14.1 42.82,88.25 41.29,88.25 40.79,87.75 C12.1 ; 44,86.25 U3.1 43.96,85.35 U4.3 ; 44,86.25 45.01,86.25 45.3,85.95 U3.3 ; C12.1 40.16,87.67 40.16,94.72 41.78,96.34 C10.1 C11.1 44.17,98.6 v1(44.21,98.64) 46.58,100.93 J14.1
VCC_3V3_R: length 183
  TOP w0.2: v1(35.12,77.81) 35.1,77.83 28.82,77.83 25.66,80.99 v1(25.66,89.29)
  TOP w0.3: v1(54.9,43.56) v1(49.52,43.56) 38.75,43.56 v1(38.27,44.04) 38.09,44.04 ; v1(33.9,8.61) 40.59,15.31 v1(44.25,15.31)
  TOP w0.5: v1(35.12,77.81) 35.24,77.81 35.26,77.83 38.25,77.83 v1(41.42,81)
  BOTTOM w0.2: v1(25.66,89.29) 25.66,90.31 26.39,91.04 26.39,93.66 22.2,97.85 R27.2
  BOTTOM w0.3: 45.28,15.56 45.28,15.31 v1(44.25,15.31) 44.25,14.31 J18.3 ; 45.28,15.56 E3.4 ; 45.28,15.56 44.93,15.9 44.93,26.87 49.2,31.14 49.2,33.7 ; 49.2,33.7 49.54,34.04 49.54,43.53 49.52,43.55 v1(49.52,43.56) ; 49.2,33.7 44.13,33.7 43.75,34.08 L1.1 43.12,35.59 R2.1 ; v1(35.12,77.81) 35.24,77.69 35.24,74.29 34.17,73.22 34.17,69.87 36.57,67.47 36.57,65.7 39.91,62.36 39.91,55.81 38.27,54.17 v1(38.27,44.04) 38.25,44.02 C5.1 38.25,42.53 U9.48 36.81,40.29 36.43,39.91 32.93,39.91 32.7,39.68 ; 32.7,39.68 32.7,34.74 31.31,33.35 U9.24 29.58,30.82 C2.1 ; 32.7,39.68 32.59,39.57 U9.36 28.47,40.89 C4.1 ; J2.1 32.6,8 33.28,8 v1(33.9,8.61) ; v1(54.9,43.56) 54.9,43.5 54.89,43.49 54.89,42.97 54.59,42.67 R29.2
  BOTTOM w0.5: U3.5 44,82.24 C15.1 43.1,81 v1(41.42,81) 40.8,81.62 C13.1 40.78,82.05 U4.5
ARM_SWCLK_R: length 66.2
  TOP w0.2: v1(30.7,43.25) 29.87,44.08 17.88,44.08 v1(17.8,44.16)
  BOTTOM w0.2: v1(30.7,43.25) 31.31,42.64 U9.37 ; J2.2 28.33,7.66 27.74,7.08 18.61,7.08 16.87,8.82 16.87,19.65 17.8,20.58 v1(17.8,44.16)
ARM_SWDIO_R: length 68.2
  TOP w0.2: v1(31.62,38.53) 30.17,38.53 27.93,40.77 26.36,40.77 25,42.13 v1(17.07,42.13)
  BOTTOM w0.2: J2.3 28.29,6.43 17.87,6.43 13.56,10.74 13.56,13 13.13,13.43 13.13,16.47 17.03,20.37 17.03,42.09 v1(17.07,42.13) ; v1(31.62,38.53) 31.58,38.57 U9.34
CA1: length 20.8
  TOP w0.2: v1(42.03,40.17) 56.92,40.17 v1(56.95,40.14)
  BOTTOM w0.2: v1(56.95,40.14) 56.96,40.15 R34.2 ; v1(42.03,40.17) 42.03,39.85 40.75,38.57 U9.3
CA2: length 77.3
  TOP w0.2: v1(68.69,79.08) 68.64,79.03 53.43,79.03 49.75,75.35 v1(39.72,75.35)
  BOTTOM w0.2: U9.4 40.8,38.07 44.49,41.76 44.49,60.95 39.72,65.72 v1(39.72,75.35) ; v1(68.69,79.08) R35.2
CA3: length 80.6
  TOP w0.2: v1(88.09,49.05) 34.33,49.05 33.78,49.6 v1(30.76,49.6)
  BOTTOM w0.2: v1(88.09,49.05) 91.24,52.2 91.24,60.17 R36.2 ; U9.38 31.81,42.98 30.76,44.03 v1(30.76,49.6)
CA4: length 31.1
  TOP w0.2: v1(32.69,26.83) 32.6,26.74 26.31,26.74 v1(26.23,26.66)
  BOTTOM w0.2: U9.21 32.78,32.53 32.78,30.08 32.75,30.05 32.75,26.89 v1(32.69,26.83) ; v1(26.23,26.66) 26.23,8.59 R37.2
CA5: length 76.8
  TOP w0.2: v1(21.99,33.42) v1(29.79,33.42) ; v1(25.47,26.09) 26.41,25.15 37.69,25.15 40.16,22.68 53.94,22.68 55.44,24.19 57.13,24.19 58.74,22.58 59.61,22.58 64.16,27.14 v1(79.15,27.14)
  BOTTOM w0.2: v1(25.47,26.09) 25.33,26.23 25.33,26.48 21.99,29.82 v1(21.99,33.42) ; v1(79.15,27.14) 80.39,27.14 R38.2 ; U9.25 v1(29.79,33.42)
CA6: length 43.4
  TOP w0.2: v1(38.32,18.11) 41.19,20.98 v1(53.84,20.98)
  BOTTOM w0.2: R39.2 54.04,21.18 v1(53.84,20.98) ; v1(38.32,18.11) 37.77,18.11 36.51,19.37 34.78,19.37 33.5,20.65 31.73,20.65 31.62,20.76 31.58,20.76 30.53,21.81 30.53,21.85 28.83,23.55 28.83,28.92 27.53,30.22 27.53,34.31 27.79,34.57 U9.26
CA7: length 83.8
  TOP w0.2: v1(23.78,46.74) 24.66,47.62 26.86,47.62 27.25,48.01 v1(36.08,48.01) 63.29,48.01 63.58,47.72 63.58,46.29 v1(65.64,44.23) ; v1(31.08,34.87) 30.93,35.02 22.72,35.02 v1(22.69,34.99)
  BOTTOM w0.2: R40.2 65.64,27.6 v1(65.64,44.23) ; v1(22.69,34.99) 22.69,45.65 v1(23.78,46.74) ; v1(31.08,34.87) 30.88,35.07 U9.27
COL1: length 166.3
  TOP w0.2: v1(162.21,40.79) 162.12,40.7 138.01,40.7 137.74,40.43 v1(115.53,40.43) 75.96,40.43 70.36,34.83 54.66,34.83 54.53,34.7 v1(39.8,34.7)
  BOTTOM w0.2: v1(115.53,40.43) 115.53,37.66 SW30.1 ; v1(162.21,40.79) 162.21,51.33 159.04,54.5 159.04,60.17 160.74,61.87 SW21.1 ; U9.10 39.43,35.07 v1(39.8,34.7)
COL2: length 149.8
  TOP w0.2: v1(40.34,34.12) 54.77,34.12 v1(54.88,34.23) 55.81,34.23 56.03,34.45 71.29,34.45 76.88,40.04 112.73,40.04 112.92,39.85 137.7,39.85 137.97,40.12 v1(139.43,40.12) ; v1(54.77,56.59) 43.65,56.59 v1(41.73,54.67)
  BOTTOM w0.2: SW22.1 41.73,56.31 v1(41.73,54.67) ; v1(54.77,56.59) 54.77,49.84 61.01,43.6 61.01,40.36 v1(54.88,34.23) ; v1(40.34,34.12) 39.53,34.12 39.08,34.57 U9.11 ; v1(139.43,40.12) 139.43,40.01 139.37,39.95 SW31.1
COL3: length 359.5
  TOP w0.2: v1(162.17,88.64) 162.17,96.34 160.82,97.69 47.15,97.69 44.23,94.77 v1(32.94,94.77) ; v1(70.49,51.66) 71.36,51.66 v1(72.99,50.03) ; v1(163.12,39.36) 112.88,39.36 112.67,39.56 78.04,39.56 v1(74.71,36.23) 72.55,34.07 56.19,34.07 v1(54.43,32.31) 52.6,30.48 38.46,30.48 38.44,30.5 38.17,30.5 v1(37.67,31)
  BOTTOM w0.2: v1(72.99,50.03) 72.99,37.95 v1(74.71,36.23) ; v1(37.67,31) 37.54,30.87 36.89,30.87 36.31,31.45 U9.14 ; SW8.1 33.14,94.57 v1(32.94,94.77) 32.94,95.26 28.47,99.73 SW1.1 ; SW23.1 v1(70.49,51.66) ; SW32.1 v1(163.12,39.36) 163.12,49.32 162.59,49.85 162.59,51.79 159.8,54.58 159.8,60.39 161.12,61.71 161.12,73.03 162.29,74.2 162.29,88.52 v1(162.17,88.64)
COL4: length 222.6
  TOP w0.2: v1(91.09,49.54) 89.49,51.14 v1(89.49,52.63) ; v1(90.08,35.36) 86.81,35.36 83.19,38.98 78.81,38.98 73.44,33.61 62.91,33.61 59.4,30.1 38.3,30.1 38.28,30.12 37.8,30.12 37.78,30.1 36.75,30.1 v1(36.42,30.42) 36.16,30.16 v1(15.38,30.16) ; v1(63.53,78.43) 53.43,78.43 49.63,74.63 v1(39.03,74.63) ; v1(89.42,60.17) 89.3,60.05 v1(63.53,60.05)
  BOTTOM w0.2: v1(89.49,52.63) SW24.1 89.42,56.64 v1(89.42,60.17) ; v1(91.09,49.54) 90.08,48.53 v1(90.08,35.36) ; v1(36.42,30.42) 35.81,31.04 U9.15 ; SW33.1 13.28,40.88 15.38,38.78 v1(15.38,30.16) ; v1(39.03,74.63) 38.09,75.57 SW15.1 ; SW2.1 56.97,95.29 SW9.1 56.24,91.54 63.53,84.25 v1(63.53,78.43) v1(63.53,60.05)
COL5: length 237.8
  TOP w0.2: v1(21.76,28.06) 23.03,29.33 35.01,29.33 35.13,29.45 v1(35.21,29.45) ; v1(61.03,77.23) 61.15,77.35 82.65,77.35 v1(82.73,77.43) 82.84,77.32 v1(90.48,77.32) 92.73,77.32 94.28,78.87 102.96,78.87 103.02,78.81 v1(103.08,78.81) ; v1(61.37,58.86) 29.53,58.86 v1(19.56,48.88)
  BOTTOM w0.2: v1(19.56,48.88) 20.11,48.33 20.11,29.71 v1(21.76,28.06) 21.76,22.99 23.32,21.43 SW34.1 ; SW10.1 75.24,93.93 82.73,86.45 v1(82.73,77.43) ; v1(103.08,78.81) 103.08,76.84 102.15,75.91 102.15,64.45 108.49,58.11 SW25.1 ; v1(35.21,29.45) 35.21,31.74 35.22,31.74 35.22,32.46 U9.16 ; v1(90.48,77.32) 90.48,88.95 92.11,90.58 92.11,104.97 89.49,107.59 SW3.1 ; v1(61.03,77.23) 61.03,75.61 SW16.1 61.92,74.64 61.92,59.41 v1(61.37,58.86)
COL6: length 226.1
  TOP w0.2: v1(124.95,78.87) 120.02,78.87 119.38,78.23 97,78.23 96.94,78.29 v1(96.81,78.29) 96.68,78.29 96.62,78.23 94.73,78.23 93.03,76.53 v1(84.99,76.53) v1(81.93,76.53) ; v1(78.18,37.07) 71.48,30.37 61.48,30.37 60.16,29.05 46.32,29.05 45.74,28.47 44.15,28.47 43.08,29.54 v1(38.04,29.54) 36.49,29.54 35.62,28.67 v1(34.57,28.67)
  BOTTOM w0.2: v1(84.99,76.53) 84.99,76.16 82.61,73.78 82.61,65.47 73.77,56.63 73.77,48.64 76.46,45.95 76.46,42.87 78.07,41.26 78.07,37.18 v1(78.18,37.07) ; v1(34.57,28.67) 34.57,30.94 34.81,31.18 U9.17 ; SW26.1 127.49,57.51 130.47,60.49 130.47,66.77 124.95,72.29 v1(124.95,78.87) ; SW4.1 108.49,99.32 103.74,94.57 SW11.1 94.24,92.07 100.96,85.35 100.96,79.91 100.76,79.71 97.23,79.71 96.81,79.29 v1(96.81,78.29) ; v1(81.93,76.53) 80.97,75.57 SW17.1 ; v1(38.04,29.54) 40.18,29.54 40.54,29.18
COL7: length 294.9
  TOP w0.2: v1(99.06,77.57) 119.88,77.57 v1(120.53,78.22) 120.64,78.11 143.4,78.11 v1(143.73,77.78) ; v1(16.21,24.51) 37.66,24.51 39.78,22.39 39.91,22.39 40,22.3 52.54,22.3 52.54,22.3 52.86,22.3 52.86,22.3 54.2,22.3 55.5,23.61 v1(55.85,23.61) ; v1(18.43,47.21) 20.78,47.21 21.57,48 26.36,48 26.8,48.44 31.96,48.44 v1(32.11,48.59) ; v1(61.92,36.51) 71.4,36.51 76.1,41.21 v1(92.4,41.21)
  BOTTOM w0.2: v1(143.73,77.78) 143.92,77.59 143.92,66.1 146.49,63.53 SW27.1 ; v1(16.21,24.51) 16.21,44.99 v1(18.43,47.21) ; v1(92.4,41.21) 92.4,41.26 92.54,41.4 92.54,55.68 98.99,62.13 SW18.1 99.06,75.64 v1(99.06,77.57) ; v1(61.92,36.51) SW36.1 61.45,34.38 57.1,34.38 55.62,32.9 55.62,23.84 v1(55.85,23.61) ; v1(120.53,78.22) 120.53,84.01 113.37,91.17 113.37,94.44 SW12.1 122.74,94.57 127.49,99.32 SW5.1 ; U9.41 33.31,43.82 32.37,44.76 32.37,48.32 v1(32.11,48.59)
COL8: length 244
  TOP w0.2: v1(141.74,77.37) 130.97,77.37 129.17,75.57 v1(121.53,75.57) v1(119.78,75.57) ; v1(35.42,42.79) 35.6,42.79 35.63,42.76 36.26,42.76 36.34,42.68 36.41,42.68 36.49,42.6 60.01,42.6 60.43,42.18 69.94,42.18 71.81,44.05 96.29,44.05 99.6,47.36 101.33,47.36 101.49,47.19 101.49,46.38 103,44.87 v1(119.67,44.87) ; v1(141.74,58.76) 165.43,58.76 v1(165.49,58.7)
  BOTTOM w0.2: v1(119.67,44.87) 120.12,44.87 120.94,45.69 120.94,48.4 123.19,50.64 123.19,53.58 121.19,55.58 121.19,74.94 121.53,75.28 v1(121.53,75.57) ; v1(35.42,42.79) 35.23,42.6 35.23,41.16 U9.45 ; SW19.1 v1(119.78,75.57) ; SW6.1 146.49,99.32 141.74,94.57 SW13.1 132.24,93.66 141.74,84.16 v1(141.74,77.37) v1(141.74,58.76) ; v1(165.49,58.7) SW28.1
COL9: length 298.7
  TOP w0.2: v1(163.12,78.84) v1(137.04,78.84) ; v1(35.88,42.18) 30.41,42.18 29.39,41.16 26.59,41.16 25.14,42.61 23.46,42.61 v1(23.36,42.71) ; v1(136.99,59.44) 24.95,59.44 v1(20.01,54.02) ; v1(125.22,38.33) 121.74,34.84 110.39,34.84 106.35,38.88 v1(94.2,38.88)
  BOTTOM w0.2: 163.12,94.57 165.49,96.94 SW7.1 ; 163.12,94.57 v1(163.12,78.84) ; 163.12,94.57 SW14.1 ; v1(20.01,54.02) 20.01,53.18 23.8,49.39 23.8,48.12 24.46,47.46 24.46,46.03 23.36,44.93 v1(23.36,42.71) ; v1(125.22,38.33) 125.22,46.76 130.79,52.33 130.79,56.72 130.99,56.92 134.47,56.92 v1(136.99,59.44) SW20.1 137.04,75.62 v1(137.04,78.84) ; SW29.1 92.89,37.57 v1(94.2,38.88) ; U9.46 35.81,42.09 35.85,42.13 35.85,42.16 v1(35.88,42.18)
Net_2: length 31.8
  TOP w0.2: v1(21.65,35.57) 31.42,35.57 31.48,35.51 v1(31.48,35.51)
  BOTTOM w0.2: v1(31.48,35.51) 31.48,35.51 31.42,35.57 29.79,35.57 ; v1(19.39,53.43) 19.39,53.26 23.42,49.23 23.42,47.34 21.65,45.57 v1(21.65,35.57)
Net_15: length 0
PA15_R_B: length 69.4
  TOP w0.2: v1(17.66,17.27) 35.96,17.27 40.32,21.63 v1(50.37,21.63) ; v1(28.22,36.92) 28.13,36.83 19,36.83 18.59,36.42 v1(18.38,36.42)
  BOTTOM w0.2: v1(18.38,36.42) 18.2,36.24 18.2,20.44 17.66,19.9 v1(17.66,17.27) ; v1(28.22,36.92) 28.37,37.07 U9.31 ; R22.2 47.98,22.64 49.36,22.64 v1(50.37,21.63)
PC14_R_R: length 42.6
  TOP w0.2: v1(31.77,36.37) 36.18,36.37 36.49,36.06 39.58,36.06 40.56,35.08 52.78,35.08 53.11,35.41 53.38,35.41 v1(53.38,35.41)
  BOTTOM w0.2: v1(53.38,35.41) 53.38,32.24 46.07,24.93 46.07,22.03 R20.2 ; U9.29 31.02,36.07 31.32,36.37 v1(31.77,36.37)
PC15_R_G: length 43.2
  TOP w0.2: v1(31.15,36.95) 32.02,36.95 32.15,36.82 36.27,36.82 36.65,36.44 39.74,36.44 40.72,35.46 52.32,35.46 52.37,35.51 52.39,35.51 v1(52.54,35.66)
  BOTTOM w0.2: v1(31.15,36.95) 30.77,36.57 U9.30 ; R21.2 45.69,21.21 45.69,25.09 52.54,31.93 v1(52.54,35.66)
PCBVER: length 18.6
  TOP w0.2: v1(53.19,40.79) 52.96,40.56 42.46,40.56 42.23,40.79 40.99,40.79 v1(40.89,40.69)
  BOTTOM w0.2: v1(53.19,40.79) 54.03,40.79 54.23,40.99 R29.1 54.25,41.39 R28.2 ; U9.2 39.27,39.07 v1(40.89,40.69)
ROW1: length 241.9
  TOP w0.2: v1(38.56,99.71) 38.62,99.71 38.67,99.66 v1(58.58,99.66) 58.6,99.64 v1(66.43,99.64) v1(85.82,99.64) v1(104.52,99.64) v1(123.24,99.64) 141.39,99.64 v1(141.43,99.68) 160.46,99.68 v1(160.49,99.71) ; v1(72.13,41.79) 71.76,41.42 40.63,41.42 37.86,38.65 35.05,38.65 v1(34.53,38.13)
  BOTTOM w0.2: U9.18 34.31,37.91 v1(34.53,38.13) ; v1(72.13,41.79) 72.13,51.74 72.67,52.28 72.67,60.13 73.6,61.06 73.6,64.77 73.47,64.9 73.47,67.34 75.93,69.8 75.93,72.55 73.23,75.25 73.23,87.03 72,88.26 72,90.24 66.43,95.81 v1(66.43,99.64) 65.59,99.64 D2.2 ; D5.2 123.24,100.58 v1(123.24,99.64) ; D6.2 141.47,99.72 v1(141.43,99.68) ; D1.2 37.15,99.71 v1(38.56,99.71) ; v1(160.49,99.71) D7.2 ; v1(104.52,99.64) 104.52,100.31 D4.2 ; D3.2 85.82,99.81 v1(85.82,99.64)
ROW2: length 203.9
  TOP w0.2: 62.13,83.56 v1(62.13,82.34) ; 62.13,83.56 62.17,83.56 64.55,85.94 81.03,85.94 v1(81.55,85.42) 84.94,82.03 v1(100.23,82.03) 100.75,81.51 118.51,81.51 v1(118.93,81.93) v1(138.53,81.93) 159.03,81.93 v1(159.43,82.33) ; 62.13,83.56 59.8,85.89 36.08,85.89 34.91,84.72 v1(34.68,84.72) ; v1(40.24,42.02) 37.25,39.03 34.53,39.03 v1(34.43,38.93)
  BOTTOM w0.2: v1(100.23,82.03) 99,82.03 D11.2 ; D12.2 117.9,82.03 118.83,82.03 v1(118.93,81.93) ; v1(40.24,42.02) 40.39,42.17 40.39,49.81 44.11,53.53 44.11,60.79 36.84,68.06 36.84,72.31 35.72,73.43 35.72,74.17 35.7,74.19 35.7,81.17 D8.2 v1(34.68,84.72) ; D14.2 158.41,82.33 v1(159.43,82.33) ; U9.19 33.81,38.31 v1(34.43,38.93) ; v1(138.53,81.93) 138.02,81.93 137.82,82.13 D13.2 ; v1(81.55,85.42) 79.69,83.55 D10.2 ; v1(62.13,82.34) D9.2
ROW3: length 162.9
  TOP w0.2: v1(37.55,66.1) 33.06,66.1 v1(31.74,67.42) 33.25,68.93 50.56,68.93 51.66,67.83 55.83,67.83 57.24,66.42 57.24,63.31 ; v1(33.53,39.03) 34.11,39.61 36.91,39.61 v1(38.58,41.27) ; v1(131.89,61.93) v1(112.93,61.93) v1(93.93,61.93) v1(74.89,61.93) 69.13,61.93 67.75,63.31 57.24,63.31 ; 57.24,63.31 v1(57.24,63.29)
  BOTTOM w0.2: D18.2 93.98,61.98 v1(93.93,61.93) ; v1(38.58,41.27) 38.94,41.64 38.94,53.39 40.34,54.79 40.34,63.31 v1(37.55,66.1) ; v1(31.74,67.42) 30.46,66.14 30.46,65.07 D15.2 ; D17.2 74.89,63.19 v1(74.89,61.93) ; v1(112.93,61.93) 112.93,63.12 D19.2 ; U9.20 33.31,38.81 v1(33.53,39.03) ; v1(131.89,61.93) D20.2 ; v1(57.24,63.29) 57.22,63.29 57.18,63.25 D16.2
ROW4: length 193.7
  TOP w0.2: v1(26.53,48.99) 31.69,48.99 31.87,49.17 33.67,49.17 34.21,48.63 66.51,48.63 v1(67.01,48.13) 67.1,48.22 v1(85.41,48.22) v1(105.04,48.22) v1(124.11,48.22) v1(143.12,48.22) v1(150,48.22) ; v1(24.99,44.72) 25,44.72 30.89,44.72 v1(31.79,43.82)
  BOTTOM w0.2: 104.82,48.22 103.81,48.22 D25.2 ; 104.82,48.22 v1(105.04,48.22) ; 104.82,48.22 104.82,45.66 96.2,37.04 96.2,33.26 92.22,29.28 D29.2 ; v1(31.79,43.82) 32.31,43.3 U9.39 ; D24.2 84.24,48.22 v1(85.41,48.22) ; D27.2 141.7,48.22 v1(143.12,48.22) ; D21.2 153.01,60.37 153.01,52.67 151.29,50.95 D28.2 150.09,48.31 v1(150,48.22) ; v1(124.11,48.22) 122.98,48.22 D26.2 ; v1(24.99,44.72) 24.99,47.79 D22.2 25.81,48.27 v1(26.53,48.99) ; v1(67.01,48.13) 65.78,48.13 D23.2
ROW5: length 233.9
  TOP w0.2: v1(156.23,25.52) 156.2,25.55 v1(135.05,25.55) 111.5,25.55 v1(111.44,25.49) 66.22,25.49 64.9,24.17 v1(64.17,24.17) 64.17,23.7 59.85,19.38 53.18,19.38 50.82,17.02 41.32,17.02 v1(40.13,15.83) 34.34,10.04 v1(25.25,10.04) ; v1(15.08,44.95) 15.1,44.93 v1(20.8,44.93) 21.18,45.31 31,45.31 31.63,44.68 v1(31.75,44.68)
  BOTTOM w0.2: D36.2 61.49,24.17 v1(64.17,24.17) ; v1(31.75,44.68) 32.81,43.62 U9.40 ; D31.2 134.79,28.18 134.89,28.08 134.89,28.04 135.03,27.9 135.03,26.07 135.05,26.05 v1(135.05,25.55) ; v1(111.44,25.49) 111.44,27.77 110.96,28.25 D30.2 ; v1(40.13,15.83) 40.92,16.62 40.92,18.34 D35.2 ; v1(15.08,44.95) 15.03,45 14.58,45 11.39,43.51 11.11,42.75 11.11,42.73 12.43,40.11 D33.2 ; v1(156.23,25.52) 156.23,27.52 D32.2 ; v1(25.25,10.04) 23.68,10.04 D34.2 22.5,16.32 25.36,19.18 25.36,25.28 20.8,29.84 v1(20.8,44.93)
UART1_RX: length 69
  BOTTOM w0.3: J14.6 51.58,103.33 49.52,101.27 49.52,92.93 52.16,90.29 52.16,81.84 49.34,79.02 46.13,79.02 44.06,76.95 44.06,67.55 52.99,58.62 52.99,48.13 R31.1
UART1_RX_R: length 25.4
  TOP w0.3: v1(34.46,45) 34.66,45.2 52.8,45.2 52.81,45.21 53.79,45.21 v1(53.93,45.35)
  BOTTOM w0.3: v1(53.93,45.35) 53.93,45.89 R31.2 ; v1(34.46,45) 34.52,44.94 34.52,44 34.31,43.79 U9.43
UART1_TX: length 70
  BOTTOM w0.3: J14.5 53.58,104.65 50,101.07 50,93.13 52.64,90.49 52.64,82.04 52.64,81.64 49.54,78.54 46.33,78.54 44.54,76.75 44.54,67.75 53.47,58.82 53.47,49.01 54.36,48.12 R30.1
UART1_TX_R: length 26
  TOP w0.3: v1(54.67,45.16) 54.23,44.72 35.07,44.72 34.62,44.26 v1(33.89,44.26)
  BOTTOM w0.3: v1(54.67,45.16) 54.56,45.27 54.56,46.51 R30.2 ; v1(33.89,44.26) 33.89,44.18 33.83,44.12 33.83,41.11 U9.42
UART2_RX: length 91.5
  TOP w0.3: v1(22.23,105.89) 22.26,105.92 32.48,105.92 v1(33,106.44)
  BOTTOM w0.3: J20.15 25.75,111.09 25.75,111.22 26.99,112.46 28.76,112.46 32.35,108.87 32.35,107.32 32.92,106.75 32.92,106.52 32.98,106.47 32.98,106.46 v1(33,106.44) 33.03,106.41 33.03,106.26 35.63,103.66 35.63,97.98 37.41,96.2 37.41,82.61 41.74,78.28 41.74,66.26 49.75,58.25 49.75,48.96 R33.1 ; J20.3 v1(22.23,105.89)
UART2_RX_R: length 29.4
  TOP w0.3: v1(38.54,32.04) 38.68,32.04 38.74,31.98 50.88,31.98 v1(51.07,32.17)
  BOTTOM w0.3: v1(51.07,32.17) 51.07,32.34 51.1,32.37 51.1,45.77 50.65,46.22 R33.2 ; v1(38.54,32.04) 38.48,32.04 37.96,32.55 U9.13
UART2_TX: length 88.4
  TOP w0.3: v1(21.6,106.52) 22.49,106.52 22.61,106.4 31.77,106.4 v1(32.07,106.7)
  BOTTOM w0.3: J20.2 21.73,106.65 v1(21.6,106.52) ; R32.1 49.25,58.07 41.26,66.06 41.26,78.08 36.93,82.41 36.93,96 35.15,97.78 35.15,103.46 32.8,105.81 32.74,105.81 32.07,106.48 v1(32.07,106.7) 32.07,106.91 31.87,107.11 31.87,108.67 28.59,111.95 27.16,111.95 26.38,111.17 J20.14
UART2_TX_R: length 28.3
  TOP w0.3: v1(50.47,32.63) 50.34,32.5 38.97,32.5 v1(38.64,32.83)
  BOTTOM w0.3: R32.2 50.62,45.41 50.62,32.78 v1(50.47,32.63) ; v1(38.64,32.83) 38.16,33.31 38.16,33.9 U9.12
USB_DM_R: length 88.3
  TOP w0.3: J20.19 23.75,109.98 23.75,109.96 24.19,109.52 v1(24.19,107.98)
  BOTTOM w0.3: J20.7 24.23,108.03 24.19,107.99 v1(24.19,107.98) 24.19,107.95 24.37,107.77 24.37,97.99 30.91,91.45 30.91,87.69 29.64,86.42 24.35,86.42 20.73,82.8 20.73,56.88 28.06,49.55 28.06,43.03 26.15,41.12 26.15,38.23 25.5,37.58 L3.3
USB_DP_R: length 89.4
  TOP w0.3: J20.18 24.38,110.13 25.02,109.49 25.02,107.85 24.52,107.35 23.77,107.35 v1(23.54,107.58)
  BOTTOM w0.3: L3.2 25.67,38.92 25.67,41.32 27.58,43.23 27.58,49.35 20.25,56.68 20.25,83 24.15,86.9 29.44,86.9 30.43,87.89 30.43,91.22 23.5,98.15 R27.1 23.89,99.01 23.89,107.23 v1(23.54,107.58) 23.54,108.25 23.71,108.42 23.71,108.99 J20.6
N16743024: length 85.9
  TOP w0.2: v1(64.76,31.73) 61.86,31.73 59.79,29.66 45.26,29.66 v1(44.88,29.28) ; v1(36.08,43.37) 36.31,43.14 36.42,43.14 36.5,43.06 36.57,43.06 36.65,42.98 60.17,42.98 60.18,42.97 v1(64.69,42.97)
  BOTTOM w0.2: R26.2 38.36,10.9 38.36,10.92 40.01,11.69 40.97,12.64 40.97,14.78 42.83,16.65 42.83,18.64 43.43,19.24 43.43,27.83 v1(44.88,29.28) ; v1(64.76,31.73) 64.76,42.9 v1(64.69,42.97) ; v1(36.08,43.37) 35.18,43.37 34.81,43 U9.44
N16743076: length 5.3
  BOTTOM w0.2: U9.9 40.33,35.57 L1.2 41.82,32.89 C6.1
N16743758: length 4.9
  BOTTOM w0.2: U9.7 38.42,36.66 39.14,36.66 39.17,36.69 41.18,36.69 41.41,36.92 C1.1 43.07,36.92 R2.2
N16743834: length 3.3
  BOTTOM w0.2: R4.1 45.3,35.58 45.51,35.37 C8.2 45.98,35.48 45.98,36.48 Y1.1
N16743838: length 11.1
  BOTTOM w0.2: U9.5 40.84,37.57 41.28,38.01 46.61,38.01 Y1.3 47.48,39.72 47.49,39.73 C7.2
N16743898: length 6.5
  BOTTOM w0.2: U9.6 40.87,37.07 41.43,37.63 43.58,37.63 R4.2
N16744056: length 2.1
  BOTTOM w0.3: C9.1 32.31,30.76 U9.22
N16744084: length 2.9
  BOTTOM w0.3: L3.1 27.3,38.58 27.81,38.07 U9.33
N16744088: length 2.7
  BOTTOM w0.3: U9.32 27.14,37.57 L3.4
N16823930: length 5.1
  BOTTOM w0.2: E3.1 49.48,17.83 49.48,19.92 R20.1
N16823933: length 7.1
  TOP w0.2: v1(50.47,18.84) 50.28,18.84 50.17,18.73 v1(48.62,18.73)
  BOTTOM w0.2: R21.1 v1(48.62,18.73) ; E3.2 50.47,16.56 v1(50.47,18.84)
N16823936: length 16.8
  TOP w0.2: v1(45.66,13.34) 45.96,13.34 47.11,14.5 49.34,14.5 52.02,17.18 v1(52.63,17.18)
  BOTTOM w0.2: R22.1 48.93,21.98 52.63,18.28 v1(52.63,17.18) ; v1(45.66,13.34) 45.66,13.52 E3.3
N16868125: length 14.7
  TOP w0.2: v1(33.29,101.12) v1(41.13,101.12)
  BOTTOM w0.2: SW1.2 42.64,102.63 v1(41.13,101.12) ; D1.1 v1(33.29,101.12)
N16868343: length 12.3
  BOTTOM w0.2: D2.1 62.96,100.82 66.13,100.82 SW2.2
N16868345: length 12.4
  BOTTOM w0.2: SW3.2 75.33,111.02 75.33,106.5 D3.1
N16868355: length 12.1
  BOTTOM w0.2: D4.1 94.33,106.7 94.33,111.02 SW4.2
N16868357: length 12.1
  BOTTOM w0.2: D5.1 113.33,106.47 113.33,111.02 SW5.2
N16868359: length 11.9
  BOTTOM w0.2: D6.1 132.33,106.64 132.33,111.02 SW6.2
N16868361: length 11.9
  BOTTOM w0.2: SW7.2 151.33,111.02 151.33,106.73 156.69,101.37 D7.1
N16868363: length 18.1
  TOP w0.2: v1(24.97,82.51) 24.97,89.14 v1(24.58,89.53)
  BOTTOM w0.2: v1(24.97,82.51) 25.29,82.19 D8.1 ; SW8.2 22.08,92.03 v1(24.58,89.53)
N16868373: length 22.7
  TOP w0.2: v1(55.7,82.34) v1(46.56,82.34) ; v1(43.75,91.75) 44.2,91.3 44.2,91.29 46.31,89.18 v1(46.31,89.09)
  BOTTOM w0.2: SW9.2 42.21,91.89 43.61,91.89 v1(43.75,91.75) ; v1(46.31,89.09) 46.56,88.84 v1(46.56,82.34) ; D9.1 v1(55.7,82.34)
N16868375: length 26.2
  TOP w0.2: v1(63.21,94.28) 65.25,94.28 67.83,91.7 75.37,91.7 v1(75.89,91.18)
  BOTTOM w0.2: D10.1 v1(75.89,91.18) ; SW10.2 63.21,94.17 v1(63.21,94.28)
N16868377: length 26.1
  TOP w0.2: v1(80.07,93.79) 83.22,93.79 83.24,93.81 87.91,93.81 90.11,91.61 93.2,91.61 v1(94.45,90.36)
  BOTTOM w0.2: D11.1 95.09,89.72 v1(94.45,90.36) ; SW11.2 v1(80.07,93.79)
N16868379: length 25.2
  TOP w0.2: v1(115.12,82.4) 102.28,82.4 v1(102,82.68)
  BOTTOM w0.2: SW12.2 99.07,88.31 102,85.38 v1(102,82.68) ; D12.1 113.84,82.4 v1(115.12,82.4)
N16868381: length 27
  TOP w0.2: v1(118.14,93.92) 123.86,93.92 126.08,91.7 132.49,91.7 v1(133.18,91.01)
  BOTTOM w0.2: D13.1 v1(133.18,91.01) ; v1(118.14,93.92) 118.07,93.85 SW13.2
N16868383: length 17.9
  BOTTOM w0.2: SW14.2 144.19,85.92 147.91,82.2 D14.1
N16868385: length 11.9
  BOTTOM w0.2: D15.1 23.07,68.66 SW15.2
N16868387: length 12
  BOTTOM w0.2: SW16.2 46.82,68.68 D16.1
N16868389: length 12
  BOTTOM w0.2: SW17.2 65.82,68.7 71.11,63.41 D17.1
N16868391: length 12.1
  BOTTOM w0.2: SW18.2 84.82,68.52 D18.1
N16868393: length 12
  BOTTOM w0.2: D19.1 103.82,68.43 SW19.2
N16868395: length 11.9
  BOTTOM w0.2: D20.1 122.82,68.61 SW20.2
N16868397: length 12.1
  BOTTOM w0.2: D21.1 146.57,68.76 SW21.2
N16868399: length 9.5
  TOP w0.2: v1(21.67,49.68) 21.67,49.71 v1(26.12,54.16)
  BOTTOM w0.2: SW22.2 27.69,54.16 v1(26.12,54.16) ; D22.1 v1(21.67,49.68)
N16868401: length 10.3
  BOTTOM w0.2: D23.1 57.82,48.3 56.44,49.68 56.44,53.91 SW23.2
N16868403: length 9.9
  BOTTOM w0.2: SW24.2 75.37,53.98 75.37,49.76 76.83,48.3 D24.1
N16868405: length 10.4
  BOTTOM w0.2: SW25.2 94.32,49.76 95.74,48.34 D25.1
N16868407: length 9.8
  BOTTOM w0.2: D26.1 117.86,49.54 115.01,49.54 113.32,51.23 SW26.2
N16868409: length 8.8
  BOTTOM w0.2: D27.1 137.8,48.55 135.78,50.57 135.78,51.9 133.65,54.03 SW27.2
N16868416: length 7.3
  BOTTOM w0.2: D28.1 147.49,50.2 SW28.2
N16868418: length 9.6
  BOTTOM w0.2: D29.1 80.51,29.28 77.69,32.1 SW29.2
N16868420: length 9.8
  BOTTOM w0.2: SW30.2 101.44,32.2 104.37,29.28 D30.1
N16868422: length 9.9
  BOTTOM w0.2: SW31.2 125.19,32.07 127.93,29.33 130.01,29.33 130.04,29.3 D31.1
N16868424: length 9
  BOTTOM w0.2: D32.1 152.31,29.29 148.94,32.66 SW32.2
N16868428: length 8.7
  BOTTOM w0.2: D33.1 6.25,34.26 6.1,34.26 6.04,34.27 5.8,34.27 5.79,34.26 4.32,34.26 4.3,34.27 4.1,34.27 4.03,34.26 3.86,34.28 3.85,34.26 2.82,34.26 2.69,34.39 SW33.2
N16868430: length 9.4
  TOP w0.2: v1(17.75,9.22) 14.95,9.22 v1(12.82,11.35)
  BOTTOM w0.2: SW34.2 12.82,11.59 v1(12.82,11.35) ; D34.1 17.79,9.22 v1(17.75,9.22)
N16868645: length 8.6
  BOTTOM w0.2: D35.1 31.63,18.02 SW35.2
N16868659: length 8.5
  BOTTOM w0.2: SW36.2 52.74,23.02 D36.1
N16872373: length 343.2
  TOP w0.2: v1(30.36,100.29) 80.96,100.29 D41.2 ; D41.2 84,105.4 85.53,106.93 85.53,109.03 81.03,113.53 D40.2 ; D41.2 94.63,103.33 95.66,104.36 101.97,104.36 D42.2 113.73,103.33 115.23,104.83 120.5,104.83 D43.2 130.06,103.33 v1(130.09,103.36) 135.46,103.36 136.53,104.43 139.9,104.43 D44.2 ; v1(59.45,42) 59.65,41.8 70.1,41.8 71.97,43.67 97.8,43.67 D63.1 102.58,44.21 v1(120.53,44.21) ; D39.1 32.87,113.53 29.47,110.13 v1(29.41,110.13) ; v1(116.9,66.84) 116.81,66.76 111.39,66.76 D57.1
  TOP w0.3: D45.1 D44.2
  BOTTOM w0.2: R34.1 57.74,41.92 59.35,41.92 59.43,42 v1(59.45,42) ; D63.1 100.46,46.97 102.93,49.45 102.97,49.45 108.03,54.51 109.6,54.51 110.14,55.05 110.14,65.15 D57.1 ; v1(120.53,44.21) 122.78,41.96 122.78,27.58 123.03,27.33 D69.1 ; v1(116.9,66.84) 120.81,70.76 120.81,76.32 124.21,79.72 D51.1 124.21,84.34 127.92,88.05 127.92,88.64 130.09,90.81 130.09,93.81 130.11,93.83 130.11,95.31 130.09,95.33 v1(130.09,103.36) ; v1(29.41,110.13) 29.02,109.74 29.02,107.29 30.36,105.95 v1(30.36,100.29)
